# EAGLE board CT_schematic (EAGLE 7.6.0)

Size 100 x 80 mm. Coordinates in mm from the lower left corner, seen from the top.
Outline: 0,0 100,0 100,80 0,80 0,0
Copper layers (1*16): Top 0.035mm / dielectric 1.5mm / Bottom 0.035mm
Design rules "default": minimum track width 10mil, minimum drill 24mil, track to track 8mil, track to pad 8mil, pad to pad 8mil, via to via 8mil, smd to smd 8mil, copper to edge 40mil, drill to drill 8mil, minimum pad ring 10mil, minimum via ring 8mil, stop-mask expansion 4mil, vias tented up to drill 0mil, thermal gap 10mil

## Footprints (pad centres in the part's own frame; a part is rotated, then mirrored left to right if it is on the bottom)
C0603 = smd 0.8 x 0.8: 1 -0.762,0; 2 0.762,0
C0402 = smd 0.5 x 0.5: 1 -0.508,0; 2 0.508,0
C1206 = smd 1.3 x 1.6: 1 -1.524,0; 2 1.524,0
C0805 = smd 1.2 x 1.3: 1 -1.016,0; 2 1.016,0
C1210 = smd 1.2 x 2.5: 1 -1.524,0; 2 1.524,0
R0603 = smd 0.8 x 0.8: 1 -0.762,0; 2 0.762,0
EXV-9H = smd 3.505 x 1.676: 1 -2.857,0; 2 2.857,0
L0603 = smd 0.8 x 0.8: 1 -0.762,0; 2 0.762,0
PJ-037B_PACKAGE = drill 3.7 square: 1 12,0 | drill 3.2 square: 2 6,0
UFBGA169 = smd 0.35 x 0.35: A1 -3.9,3.9; A2 -3.25,3.9; A3 -2.6,3.9; A4 -1.95,3.9; A5 -1.3,3.9; A6 -0.65,3.9; A7 0,3.9; A8 0.65,3.9; A9 1.3,3.9; A10 1.95,3.9; A11 2.6,3.9; A12 3.25,3.9; A13 3.9,3.9; B1 -3.9,3.25; B2 -3.25,3.25; B3 -2.6,3.25; B4 -1.95,3.25; B5 -1.3,3.25; B6 -0.65,3.25; B7 0,3.25; B8 0.65,3.25; B9 1.3,3.25; B10 1.95,3.25; B11 2.6,3.25; B12 3.25,3.25; B13 3.9,3.25; C1 -3.9,2.6; C2 -3.25,2.6; C3 -2.6,2.6; C4 -1.95,2.6; C5 -1.3,2.6; C6 -0.65,2.6; C7 0,2.6; C8 0.65,2.6; C9 1.3,2.6; C10 1.95,2.6; C11 2.6,2.6; C12 3.25,2.6; C13 3.9,2.6; D1 -3.9,1.95; D2 -3.25,1.95; D3 -2.6,1.95; D4 -1.95,1.95; D5 -1.3,1.95; D6 -0.65,1.95; D7 0,1.95; D8 0.65,1.95; D9 1.3,1.95; D10 1.95,1.95; D11 2.6,1.95; D12 3.25,1.95; D13 3.9,1.95; E1 -3.9,1.3; E2 -3.25,1.3; E3 -2.6,1.3; E4 -1.95,1.3; E5 -1.3,1.3; E6 -0.65,1.3; E7 0,1.3; E8 0.65,1.3; E9 1.3,1.3; E10 1.95,1.3; E11 2.6,1.3; E12 3.25,1.3; E13 3.9,1.3; F1 -3.9,0.65; F2 -3.25,0.65; F3 -2.6,0.65; F4 -1.95,0.65; F5 -1.3,0.65; F6 -0.65,0.65; F7 0,0.65; F8 0.65,0.65; F9 1.3,0.65; F10 1.95,0.65; F11 2.6,0.65; F12 3.25,0.65; F13 3.9,0.65; G1 -3.9,0; G2 -3.25,0; G3 -2.6,0; G4 -1.95,0; G5 -1.3,0; G6 -0.65,0; G7 0,0; G8 0.65,0; G9 1.3,0; G10 1.95,0; G11 2.6,0; G12 3.25,0; G13 3.9,0; H1 -3.9,-0.65; H2 -3.25,-0.65; H3 -2.6,-0.65; H4 -1.95,-0.65; H5 -1.3,-0.65; H6 -0.65,-0.65; H7 0,-0.65; H8 0.65,-0.65; H9 1.3,-0.65; H10 1.95,-0.65; H11 2.6,-0.65; H12 3.25,-0.65; H13 3.9,-0.65; J1 -3.9,-1.3; J2 -3.25,-1.3; J3 -2.6,-1.3; J4 -1.95,-1.3; J5 -1.3,-1.3; J6 -0.65,-1.3; J7 0,-1.3; J8 0.65,-1.3; J9 1.3,-1.3; J10 1.95,-1.3; J11 2.6,-1.3; J12 3.25,-1.3; J13 3.9,-1.3; K1 -3.9,-1.95; K2 -3.25,-1.95; K3 -2.6,-1.95; K4 -1.95,-1.95; K5 -1.3,-1.95; K6 -0.65,-1.95; K7 0,-1.95; K8 0.65,-1.95; K9 1.3,-1.95; K10 1.95,-1.95; K11 2.6,-1.95; K12 3.25,-1.95; K13 3.9,-1.95; L1 -3.9,-2.6; L2 -3.25,-2.6; L3 -2.6,-2.6; L4 -1.95,-2.6; L5 -1.3,-2.6; L6 -0.65,-2.6; L7 0,-2.6; L8 0.65,-2.6; L9 1.3,-2.6; L10 1.95,-2.6; L11 2.6,-2.6; L12 3.25,-2.6; L13 3.9,-2.6; M1 -3.9,-3.25; M2 -3.25,-3.25; M3 -2.6,-3.25; M4 -1.95,-3.25; M5 -1.3,-3.25; M6 -0.65,-3.25; M7 0,-3.25; M8 0.65,-3.25; M9 1.3,-3.25; M10 1.95,-3.25; M11 2.6,-3.25; M12 3.25,-3.25; M13 3.9,-3.25; N1 -3.9,-3.9; N2 -3.25,-3.9; N3 -2.6,-3.9; N4 -1.95,-3.9; N5 -1.3,-3.9; N6 -0.65,-3.9; N7 0,-3.9; N8 0.65,-3.9; N9 1.3,-3.9; N10 1.95,-3.9; N11 2.6,-3.9; N12 3.25,-3.9; N13 3.9,-3.9
TSSOP20-I = smd 0.4 x 1.35: 1 -2.925,-2.875; 2 -2.275,-2.875; 3 -1.625,-2.875; 4 -0.975,-2.875; 5 -0.325,-2.875; 6 0.325,-2.875; 7 0.975,-2.875; 8 1.625,-2.875; 9 2.275,-2.875; 10 2.925,-2.875; 11 2.925,2.875; 12 2.275,2.875; 13 1.625,2.875; 14 0.975,2.875; 15 0.325,2.875; 16 -0.325,2.875; 17 -0.975,2.875; 18 -1.625,2.875; 19 -2.275,2.875; 20 -2.925,2.875
182-009-MALE = drill 1.194 pad 1.524 octagon: 1 -5.537,10.923; 2 -2.769,10.923; 3 0,10.923; 4 2.769,10.923; 5 5.537,10.923; 6 -4.153,8.08; 7 -1.384,8.08; 8 1.384,8.08; 9 4.153,8.08 | hole 3.048: -12.446,9.501; 12.446,9.501
QFN-24 = smd 0.7 x 0.305: 1 -1.815,1.25; 2 -1.815,0.75; 3 -1.815,0.25; 4 -1.815,-0.25; 5 -1.815,-0.73; 6 -1.815,-1.25; 13 1.815,-1.25; 14 1.815,-0.75; 15 1.815,-0.25; 16 1.815,0.25; 17 1.815,0.75; 18 1.815,1.25 | smd 0.305 x 0.7: 7 -1.25,-1.815; 8 -0.75,-1.815; 9 -0.25,-1.815; 10 0.25,-1.815; 11 0.75,-1.815; 12 1.25,-1.815; 19 1.25,1.815; 20 0.75,1.815; 21 0.25,1.815; 22 -0.25,1.815; 23 -0.75,1.815; 24 -1.25,1.815 | smd 2.591 x 2.591: 25 0,0
FCI_10118193-0001LF = smd 0.4 x 1.35: 1 -1.3,2.675; 2 -0.65,2.675; 3 0,2.675; 4 0.65,2.675; 5 1.3,2.675 | smd 1.6 x 1.4: 6 -3.2,2.45; 7 3.2,2.45 | smd 1.9 x 1.9: 8 -1.2,0; 9 1.2,0 | hole 0.5: -3.3,0; 3.3,0
SOT143B = smd 1 x 0.7: 1 -0.75,-1 | smd 0.6 x 0.7: 2 0.95,-1; 3 0.95,1; 4 -0.95,1
ABS07-32.768KHZ-7-T = smd 1.1 x 2.4: 1 -2.5,0; 2 0,0
ASFL1 = smd 1.7 x 1.5: 1 -1.27,-1.1; 2 1.27,-1.1; 3 1.27,1.1; 4 -1.27,1.1
WSON-8 = smd 0.3 x 0.6: 1 -0.75,0; 2 0.05,0; 3 0.85,0; 4 1.65,0; 5 1.65,3.8; 6 0.85,3.8; 7 0.05,3.8; 8 -0.75,3.8 | smd 3 x 2.6: PAD 0.45,1.9
QFN-38_UHF = smd 0.75 x 0.3: 1 -2.4,2.75; 2 -2.4,2.25; 3 -2.4,1.75; 4 -2.4,1.25; 6 -2.4,0.25; 7 -2.4,-0.25; 8 -2.4,-0.75; 9 -2.4,-1.25; 10 -2.4,-1.75; 11 -2.4,-2.25; 12 -2.4,-2.75; 20 2.4,-2.75; 21 2.4,-2.25; 22 2.4,-1.75; 23 2.4,-1.25; 24 2.4,-0.75; 25 2.4,-0.25; 26 2.4,0.25; 27 2.4,0.75; 28 2.4,1.25; 29 2.4,1.75; 30 2.4,2.25; 31 2.4,2.75 | smd 0.758 x 0.3: 5 -2.4,0.75 | smd 0.3 x 0.75: 13 -1.5,-3.4; 14 -1,-3.4; 15 -0.5,-3.4; 16 0,-3.4; 17 0.5,-3.4; 18 1,-3.4; 19 1.5,-3.4; 32 1.5,3.4; 33 1,3.4; 34 0.5,3.4; 35 0,3.4; 36 -0.5,3.4; 37 -1,3.4; 38 -1.5,3.4 | smd 3.2 x 5.2: 39 0,0
IRF8306MTRPBF = smd 0.9 x 1.85: 1 0,0; 2 0,-2.35; 6 6.4,0; 7 6.4,-2.35 | smd 0.75 x 0.75: 3 1.75,-1.175 | smd 1.45 x 0.87: 4 3.5,-0.565; 5 3.5,-1.785
SW_4-1437565-2 = smd 1.4 x 2.1: 1 -2.23,4.55; 2 -2.23,-4.55; 3 2.23,4.55; 4 2.23,-4.55
LGM67K-G1J2-24-Z = smd 0.8 x 1.4: A -2,0; C 0,0
NC7SZ125M5X = smd 1.3 x 0.7: 1 -1.3,0.95; 2 -1.3,0; 3 -1.3,-0.95; 4 1.3,-0.95; 5 1.3,0.95
DUMMY_PACKAGE_236 = drill 0.3: 1 0,-1; 2 1.5,-1; 3 3,-1

## Placement (x,y rotation side)
C1  1e-06  [C0603]  -45.72,74.93 0 top  (outside the outline)
C2  1e-07  [C0603]  -49.53,74.93 0 top  (outside the outline)
C3  1e-07  [C0603]  -53.34,74.93 0 top  (outside the outline)
C4  1e-07  [C0603]  -57.15,74.93 0 top  (outside the outline)
C5  1e-07  [C0603]  -60.96,74.93 0 top  (outside the outline)
C6  1e-07  [C0603]  -64.77,74.93 0 top  (outside the outline)
C7  1e-07  [C0603]  -68.58,74.93 0 top  (outside the outline)
C8  1e-07  [C0603]  -72.39,74.93 0 top  (outside the outline)
C9  1e-07  [C0603]  -76.2,74.93 0 top  (outside the outline)
C10  1e-07  [C0603]  -80.01,74.93 0 top  (outside the outline)
C11  1e-07  [C0603]  -83.82,74.93 0 top  (outside the outline)
C12  1e-07  [C0603]  -15.24,80.01 0 top  (outside the outline)
C13  1e-07  [C0603]  -19.05,80.01 0 top  (outside the outline)
C14  1e-07  [C0603]  -22.86,80.01 0 top  (outside the outline)
C15  1e-07  [C0603]  -26.67,80.01 0 top  (outside the outline)
C16  1e-07  [C0603]  -30.48,80.01 0 top  (outside the outline)
C17  4.7e-06  [C0603]  -34.29,74.93 0 top  (outside the outline)
C18  1e-08  [C0603]  -34.29,80.01 0 top  (outside the outline)
C19  1e-06  [C0603]  -38.1,80.01 0 top  (outside the outline)
C20  1e-07  [C0402]  -19.05,85.09 0 top  (outside the outline)
C21  1e-07  [C0402]  -22.86,85.09 0 top  (outside the outline)
C22  1e-11  [C0402]  -26.67,85.09 0 top  (outside the outline)
C23  1e-11  [C0402]  -30.48,85.09 0 top  (outside the outline)
C24  1e-07  [C0402]  -34.29,85.09 0 top  (outside the outline)
C25  1e-07  [C0402]  -38.1,85.09 0 top  (outside the outline)
C26  1e-07  [C0402]  -41.91,85.09 0 top  (outside the outline)
C27  1e-07  [C0402]  -45.72,85.09 0 top  (outside the outline)
C28  1e-07  [C0402]  -49.53,85.09 0 top  (outside the outline)
C29  1e-07  [C0402]  -53.34,85.09 0 top  (outside the outline)
C30  1e-08  [C0402]  -57.15,85.09 0 top  (outside the outline)
C31  2.2e-06  [C0603]  -38.1,74.93 0 top  (outside the outline)
C32  1e-08  [C0402]  -60.96,85.09 0 top  (outside the outline)
C33  1e-08  [C0402]  -64.77,85.09 0 top  (outside the outline)
C34  1e-06  [C0603]  -41.91,80.01 0 top  (outside the outline)
C35  1e-08  [C0402]  -68.58,85.09 0 top  (outside the outline)
C36  1e-08  [C0402]  -72.39,85.09 0 top  (outside the outline)
C37  1e-08  [C0402]  -76.2,85.09 0 top  (outside the outline)
C38  1e-05  [C1206]  -85.09,55.88 0 top  (outside the outline)
C39  1e-05  [C0805]  -40.64,63.5 0 top  (outside the outline)
C40  1e-08  [C0402]  -80.01,85.09 0 top  (outside the outline)
C41  1e-05  [C1206]  -16.51,63.5 0 top  (outside the outline)
C42  1e-05  [C0805]  -45.72,63.5 0 top  (outside the outline)
C43  1e-06  [C0603]  -45.72,80.01 0 top  (outside the outline)
C44  1e-05  [C1210]  -78.74,55.88 0 top  (outside the outline)
C45  1e-08  [C0402]  -83.82,85.09 0 top  (outside the outline)
C46  1e-05  [C1206]  -22.86,63.5 0 top  (outside the outline)
C47  1e-05  [C0805]  -50.8,63.5 0 top  (outside the outline)
C48  1e-07  [C0402]  -15.24,90.17 0 top  (outside the outline)
C49  2.2e-06  [C0603]  -41.91,74.93 0 top  (outside the outline)
C50  2.45e-08  [R0603]  -35.56,69.85 0 top  (outside the outline)
C51  2.8258362168397e-09  [R0603]  -60.96,63.5 0 top  (outside the outline)
C52  7.105e-09  [R0603]  -78.74,63.5 0 top  (outside the outline)
C53  0.0001  [EXV-9H]  -17.78,57.15 0 top  (outside the outline)
C54  0.0001  [EXV-9H]  -29.21,57.15 0 top  (outside the outline)
C55  1e-08  [C0402]  -19.05,90.17 0 top  (outside the outline)
C56  1e-08  [C0402]  -22.86,90.17 0 top  (outside the outline)
F1  240.0  [L0603]  -49.53,80.01 0 top  (outside the outline)
J1  PJ-037B  [PJ-037B_PACKAGE]  -82.55,7.62 0 top  (outside the outline)
R2  1000.0  [R0603]  -53.34,80.01 0 top  (outside the outline)
R7  4700.0  [R0603]  -57.15,80.01 0 top  (outside the outline)
R8  4700.0  [R0603]  -60.96,80.01 0 top  (outside the outline)
R9  10000.0  [R0603]  -40.64,69.85 0 top  (outside the outline)
R10  10000.0  [R0603]  -45.72,69.85 0 top  (outside the outline)
R11  10000.0  [R0603]  -50.8,69.85 0 top  (outside the outline)
R12  10000.0  [R0603]  -55.88,69.85 0 top  (outside the outline)
R13  8060.0  [R0603]  -64.77,80.01 0 top  (outside the outline)
R14  100000.0  [R0603]  -83.82,63.5 0 top  (outside the outline)
R15  200.0  [R0603]  -68.58,80.01 0 top  (outside the outline)
R16  1000.0  [R0603]  -72.39,80.01 0 top  (outside the outline)
R17  100000.0  [R0603]  -15.24,69.85 0 top  (outside the outline)
R18  806.0  [R0603]  -76.2,80.01 0 top  (outside the outline)
R19  1000.0  [R0603]  -80.01,80.01 0 top  (outside the outline)
R20  100000.0  [R0603]  -20.32,69.85 0 top  (outside the outline)
R21  153694.38  [R0603]  -73.66,63.5 0 top  (outside the outline)
R22  100000.0  [R0603]  -25.4,69.85 0 top  (outside the outline)
R23  100000.0  [R0603]  -30.48,69.85 0 top  (outside the outline)
R24  200.0  [R0603]  -83.82,80.01 0 top  (outside the outline)
R25  1000.0  [R0603]  -15.24,85.09 0 top  (outside the outline)
R26  10000.0  [R0603]  -60.96,69.85 0 top  (outside the outline)
R27  75000.0  [R0603]  -66.04,69.85 0 top  (outside the outline)
R28  10000.0  [R0603]  -71.12,69.85 0 top  (outside the outline)
R29  10000.0  [R0603]  -76.2,69.85 0 top  (outside the outline)
R30  95300.0  [R0603]  -81.28,69.85 0 top  (outside the outline)
R31  95300.0  [R0603]  -15.24,74.93 0 top  (outside the outline)
R32  10000.0  [R0603]  -20.32,74.93 0 top  (outside the outline)
R33  10000.0  [R0603]  -25.4,74.93 0 top  (outside the outline)
R34  10000.0  [R0603]  -30.48,74.93 0 top  (outside the outline)
R35  70381.818181818  [R0603]  -68.58,63.5 0 top  (outside the outline)
U1  STM32F429AIH6  [UFBGA169]  -62.23,7.62 0 top  (outside the outline)
U2  SP3203ECY-L/TR  [TSSOP20-I]  -43.18,27.94 0 top  (outside the outline)
U3  182-009-113R531  [182-009-MALE]  -36.83,6.35 0 top  (outside the outline)
U4  USB3317C-CP-TR  [QFN-24]  -71.12,55.88 0 top  (outside the outline)
U5  10118193-0001LF  [FCI_10118193-0001LF]  -71.12,46.99 0 top  (outside the outline)
U6  prtr5v0u2ax  [SOT143B]  -35.56,90.17 0 top  (outside the outline)
U7  ABS07-32.768KHZ-7-T  [ABS07-32.768KHZ-7-T]  -50.8,57.15 0 top  (outside the outline)
U8  ASFL1-25MHZ-NCS  [ASFL1]  -45.72,48.26 0 top  (outside the outline)
U9  ASFL1-26MHZ-NCS  [ASFL1]  -62.23,48.26 0 top  (outside the outline)
U10  LP3878SDX-ADJ/NOPB  [WSON-8]  -30.48,36.83 0 top  (outside the outline)
U11  LP3878SDX-ADJ/NOPB  [WSON-8]  -50.8,36.83 0 top  (outside the outline)
U12  LP2951ACSDX/NOPB  [WSON-8]  -29.21,45.72 0 top  (outside the outline)
U13  LP3878SDX-ADJ/NOPB  [WSON-8]  -71.12,36.83 0 top  (outside the outline)
U14  LTC2928CUHF#PBF  [QFN-38_UHF]  -80.01,46.99 0 top  (outside the outline)
U15  IRF8306MTRPbF  [IRF8306MTRPBF]  -60.96,27.94 0 top  (outside the outline)
U16  IRF8306MTRPbF  [IRF8306MTRPBF]  -76.2,27.94 0 top  (outside the outline)
U17  4-1437565-2  [SW_4-1437565-2]  -27.94,27.94 0 top  (outside the outline)
U18  Q65110A2395  [LGM67K-G1J2-24-Z]  -59.69,55.88 0 top  (outside the outline)
U19  nc7sz125m5x  [NC7SZ125M5X]  -27.94,63.5 0 top  (outside the outline)
U20  nc7sz125m5x  [NC7SZ125M5X]  -34.29,63.5 0 top  (outside the outline)
U21  Dummy  [DUMMY_PACKAGE_236]  -41.91,90.17 0 top  (outside the outline)

## Library data of the parts
C1-C56 F1 J1 R2 R7-R35 U1-U21 = circuit_tree

## Nets
CLK_CRYSTAL_U1_E1: C22.1 U1.E1 U7.1
CLK_CRYSTAL_U1_F1: C23.1 U1.F1 U7.2
CLK_U1_G2: U1.G2 U8.3
CLK_U4_23: U4.23 U9.3
GND: C1.2 C2.2 C3.2 C4.2 C5.2 C6.2 C7.2 C8.2 C9.2 C10.2 C11.2 C12.2 C13.2 C14.2 C15.2 C16.2 C17.2 C18.2 C19.2 C20.2 C21.2 C22.2 C23.2 C24.2 C25.2 C28.2 C29.2 C30.2 C31.2 C32.2 C33.2 C34.2 C35.2 C36.2 C37.2 C38.2 C39.2 C40.2 C41.2 C42.2 C43.2 C44.2 C45.2 C46.2 C47.2 C48.2 C49.2 C50.2 C51.2 C52.2 C53.2 C54.2 C55.2 C56.2 J1.2 R2.2 R11.2 R13.2 R16.2 R19.2 R22.2 R25.2 R27.2 R30.2 R31.2 R32.2 R33.2 R34.2 U1.D7 U1.D11 U1.E7 U1.F5 U1.F6 U1.G7 U1.G9 U1.J1 U1.J2 U1.J6 U1.J7 U1.J10 U2.18 U3.5 U4.25 U5.5 U5.6 U5.7 U5.8 U5.9 U6.1 U8.2 U9.2 U10.3 U10.PAD U11.3 U11.PAD U12.3 U12.4 U12.PAD U13.3 U13.PAD U14.8 U14.9 U14.10 U14.12 U14.13 U14.24 U14.25 U14.30 U14.32 U14.39 U18.C U19.1 U19.3 U20.1 U20.3 U21.1
NET_U1_A5: R10.1 U1.A5
NET_U1_C3: R9.1 U1.C3
NET_U1_D12: C21.1 U1.D12
NET_U1_H2: R7.1 U1.H2 U19.4
NET_U1_J4: C18.1 C19.1 F1.1 U1.J3 U1.J4
NET_U1_L5: R11.1 U1.L5
NET_U1_M1: R12.1 U1.M1
NET_U1_N10: U18.A
NET_U1_N11: U17.3 U17.4
NET_U2_1: C26.1 U2.1
NET_U2_2: C28.1 U2.2
NET_U2_3: C26.2 U2.3
NET_U2_4: C27.1 U2.4
NET_U2_5: C27.2 U2.5
NET_U2_6: C29.1 U2.6
NET_U2_20: U2.20
NET_U3_2: U2.14 U3.2
NET_U3_3: U2.17 U3.3
NET_U3_7: U2.13 U3.7
NET_U3_8: U2.16 U3.8
NET_U4_4: C31.1 U4.4
NET_U4_22: R8.1 U4.22 U20.4
NET_U4_24: R13.1 U4.24
NET_U5_1: C34.1 U4.2 U5.1 U6.4
NET_U5_2: U4.5 U5.2 U6.3
NET_U5_3: U4.6 U5.3 U6.2
NET_U10_1: C37.1 U10.1
NET_U10_6: R15.2 R16.1 U10.6
NET_U10_8: R14.1 U10.8
NET_U11_1: C40.1 U11.1
NET_U11_6: R18.2 R19.1 U11.6
NET_U11_8: R17.1 U11.8
NET_U12_5: R20.1 U12.5
NET_U12_7: R21.2 R22.1 U12.7
NET_U13_1: C45.1 U13.1
NET_U13_6: R24.2 R25.1 U13.6
NET_U13_8: R23.1 U13.8
NET_U14_3: R33.1 U14.3
NET_U14_6: R30.1 U14.6
NET_U14_7: R31.1 U14.7
NET_U14_16: R32.1 R35.1 U14.16
NET_U14_18: R29.1 U14.18
NET_U14_19: R28.1 U14.19 U14.20
NET_U14_21: R26.1 R27.1 U14.21 U19.2 U20.2
NET_U14_22: C48.1 R26.2 R28.2 R29.2 U14.11 U14.22
NET_U14_26: C51.1 U14.26
NET_U14_27: C50.1 U14.27
NET_U14_28: C52.1 U14.28
NET_U14_38: R34.1 U14.38
NET_U15_3: U14.2 U15.3
NET_U16_3: U14.37 U16.3
NET_U17_1: R2.1 U17.1 U17.2
PROC_TIM1_CH1: U1.E13 U21.3
PROC_TIM1_CH2: U1.E8 U21.2
PROC_UART4_RX: U1.B10 U2.11
PROC_UART4_TX: U1.C10 U2.7
PROC_USB_OTG_HS_ULPI_CK: U1.M3 U4.12
PROC_USB_OTG_HS_ULPI_D0: U1.K3 U4.16
PROC_USB_OTG_HS_ULPI_D1: U1.N4 U4.15
PROC_USB_OTG_HS_ULPI_D2: U1.K5 U4.14
PROC_USB_OTG_HS_ULPI_D3: U1.L9 U4.13
PROC_USB_OTG_HS_ULPI_D4: U1.M9 U4.11
PROC_USB_OTG_HS_ULPI_D5: U1.N12 U4.10
PROC_USB_OTG_HS_ULPI_D6: U1.M12 U4.9
PROC_USB_OTG_HS_ULPI_D7: U1.D5 U4.8
PROC_USB_OTG_HS_ULPI_DIR: U1.H6 U4.19
PROC_USB_OTG_HS_ULPI_NXT: U1.H7 U4.18
PROC_USB_OTG_HS_ULPI_STP: U1.G6 U4.20
VCC_9V0: C49.1 C53.1 C54.1 J1.1 R35.2 U14.23 U15.1 U15.2 U15.6 U15.7 U16.1 U16.2 U16.6 U16.7
VCC_S1_9V0: C38.1 C41.1 C43.1 R14.2 R17.2 U10.4 U11.4 U12.8 U15.4 U15.5
VCC_S2_9V0: C46.1 R23.2 U13.4 U16.4 U16.5
VCC_TIER1_1V2: C20.1 C39.1 R15.1 U1.N9 U10.5
VCC_TIER1_1V8: C1.1 C2.1 C3.1 C4.1 C5.1 C6.1 C7.1 C8.1 C9.1 C10.1 C11.1 C12.1 C13.1 C14.1 C15.1 C16.1 C17.1 C25.1 C32.1 C33.1 C42.1 C55.1 C56.1 F1.2 R7.2 R8.2 R9.2 R10.2 R12.2 R18.1 U1.D3 U1.D6 U1.D10 U1.E5 U1.E6 U1.F4 U1.F7 U1.F8 U1.G8 U1.G10 U1.H4 U1.H8 U1.J11 U1.K6 U1.L6 U2.12 U4.17 U4.21 U11.5 U19.5 U20.5
VCC_TIER1_3V3: C24.1 C30.1 C35.1 C36.1 C44.1 R20.2 R21.1 U2.19 U4.3 U8.4 U9.4 U12.1
VCC_TIER2_1V2: C47.1 R24.1 U13.5

## Tracks (layer width: path | path; a pad name or v marks a point on that pad's centre or on a via)
CLK_CRYSTAL_U1_E1  (2 unrouted)
CLK_CRYSTAL_U1_F1  (2 unrouted)
CLK_U1_G2  (1 unrouted)
CLK_U4_23  (1 unrouted)
GND  (115 unrouted)
NET_U1_A5  (1 unrouted)
NET_U1_C3  (1 unrouted)
NET_U1_D12  (1 unrouted)
NET_U1_H2  (2 unrouted)
NET_U1_J4  (4 unrouted)
NET_U1_L5  (1 unrouted)
NET_U1_M1  (1 unrouted)
NET_U1_N11  (1 unrouted)
NET_U2_1  (1 unrouted)
NET_U2_2  (1 unrouted)
NET_U2_3  (1 unrouted)
NET_U2_4  (1 unrouted)
NET_U2_5  (1 unrouted)
NET_U2_6  (1 unrouted)
NET_U3_2  (1 unrouted)
NET_U3_3  (1 unrouted)
NET_U3_7  (1 unrouted)
NET_U3_8  (1 unrouted)
NET_U4_4  (1 unrouted)
NET_U4_22  (2 unrouted)
NET_U4_24  (1 unrouted)
NET_U5_1  (3 unrouted)
NET_U5_2  (2 unrouted)
NET_U5_3  (2 unrouted)
NET_U10_1  (1 unrouted)
NET_U10_6  (2 unrouted)
NET_U10_8  (1 unrouted)
NET_U11_1  (1 unrouted)
NET_U11_6  (2 unrouted)
NET_U11_8  (1 unrouted)
NET_U12_5  (1 unrouted)
NET_U12_7  (2 unrouted)
NET_U13_1  (1 unrouted)
NET_U13_6  (2 unrouted)
NET_U13_8  (1 unrouted)
NET_U14_3  (1 unrouted)
NET_U14_6  (1 unrouted)
NET_U14_7  (1 unrouted)
NET_U14_16  (2 unrouted)
NET_U14_18  (1 unrouted)
NET_U14_19  (2 unrouted)
NET_U14_21  (4 unrouted)
NET_U14_22  (5 unrouted)
NET_U14_26  (1 unrouted)
NET_U14_27  (1 unrouted)
NET_U14_28  (1 unrouted)
NET_U14_38  (1 unrouted)
NET_U15_3  (1 unrouted)
NET_U16_3  (1 unrouted)
NET_U17_1  (2 unrouted)
PROC_TIM1_CH1  (1 unrouted)
PROC_TIM1_CH2  (1 unrouted)
PROC_UART4_RX  (1 unrouted)
PROC_UART4_TX  (1 unrouted)
PROC_USB_OTG_HS_ULPI_CK  (1 unrouted)
PROC_USB_OTG_HS_ULPI_D0  (1 unrouted)
PROC_USB_OTG_HS_ULPI_D1  (1 unrouted)
PROC_USB_OTG_HS_ULPI_D2  (1 unrouted)
PROC_USB_OTG_HS_ULPI_D3  (1 unrouted)
PROC_USB_OTG_HS_ULPI_D4  (1 unrouted)
PROC_USB_OTG_HS_ULPI_D5  (1 unrouted)
PROC_USB_OTG_HS_ULPI_D6  (1 unrouted)
PROC_USB_OTG_HS_ULPI_D7  (1 unrouted)
PROC_USB_OTG_HS_ULPI_DIR  (1 unrouted)
PROC_USB_OTG_HS_ULPI_NXT  (1 unrouted)
PROC_USB_OTG_HS_ULPI_STP  (1 unrouted)
VCC_9V0  (13 unrouted)
VCC_S1_9V0  (9 unrouted)
VCC_S2_9V0  (4 unrouted)
VCC_TIER1_1V2  (4 unrouted)
VCC_TIER1_1V8  (50 unrouted)
VCC_TIER1_3V3  (11 unrouted)
VCC_TIER2_1V2  (2 unrouted)